# Altium PCB PCB_Automation System_final_2022-08-13.pcbdoc
Units mm, origin at the board's own origin, x right, y up, seen from the top; angles counter-clockwise.
Board outline 133.22 x 93.98 mm, 2 copper layers (Top Layer, Bottom Layer); 24 components, 25 nets, 102 pads, 9 vias.
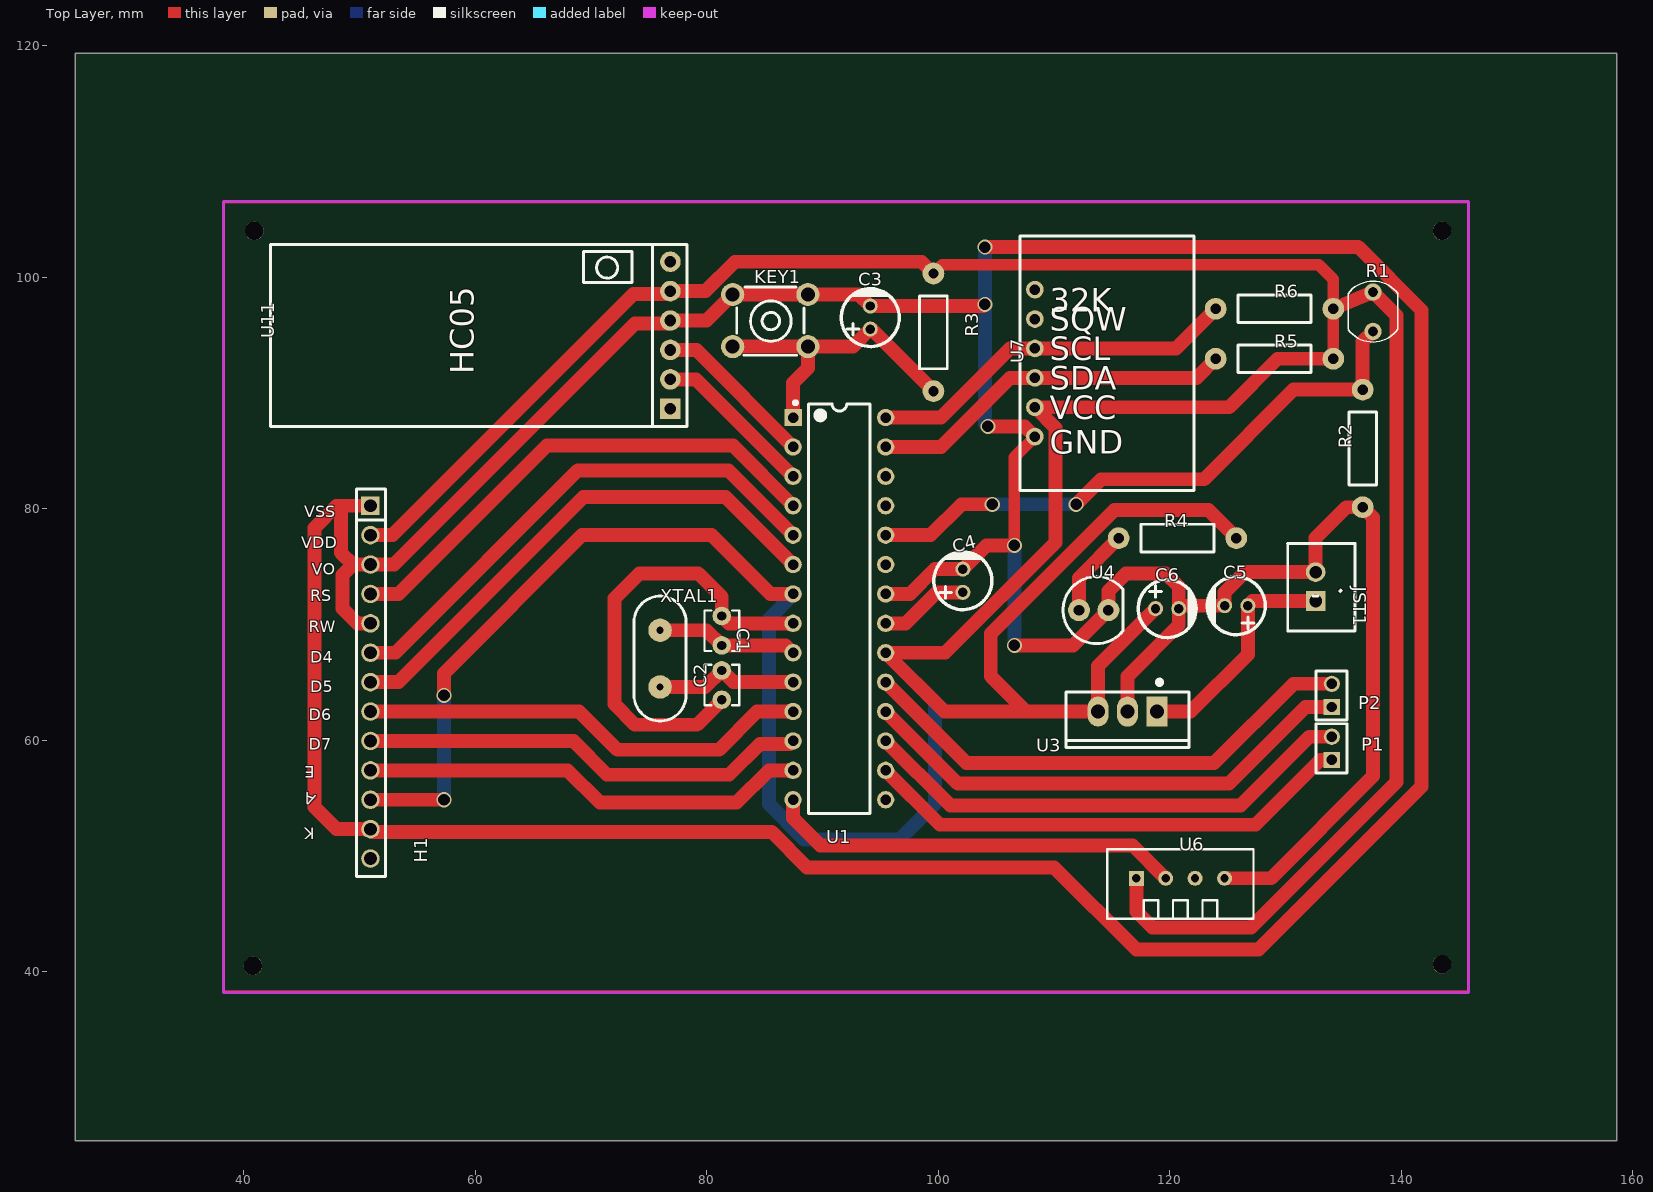
[diagram p0: Top Layer view]
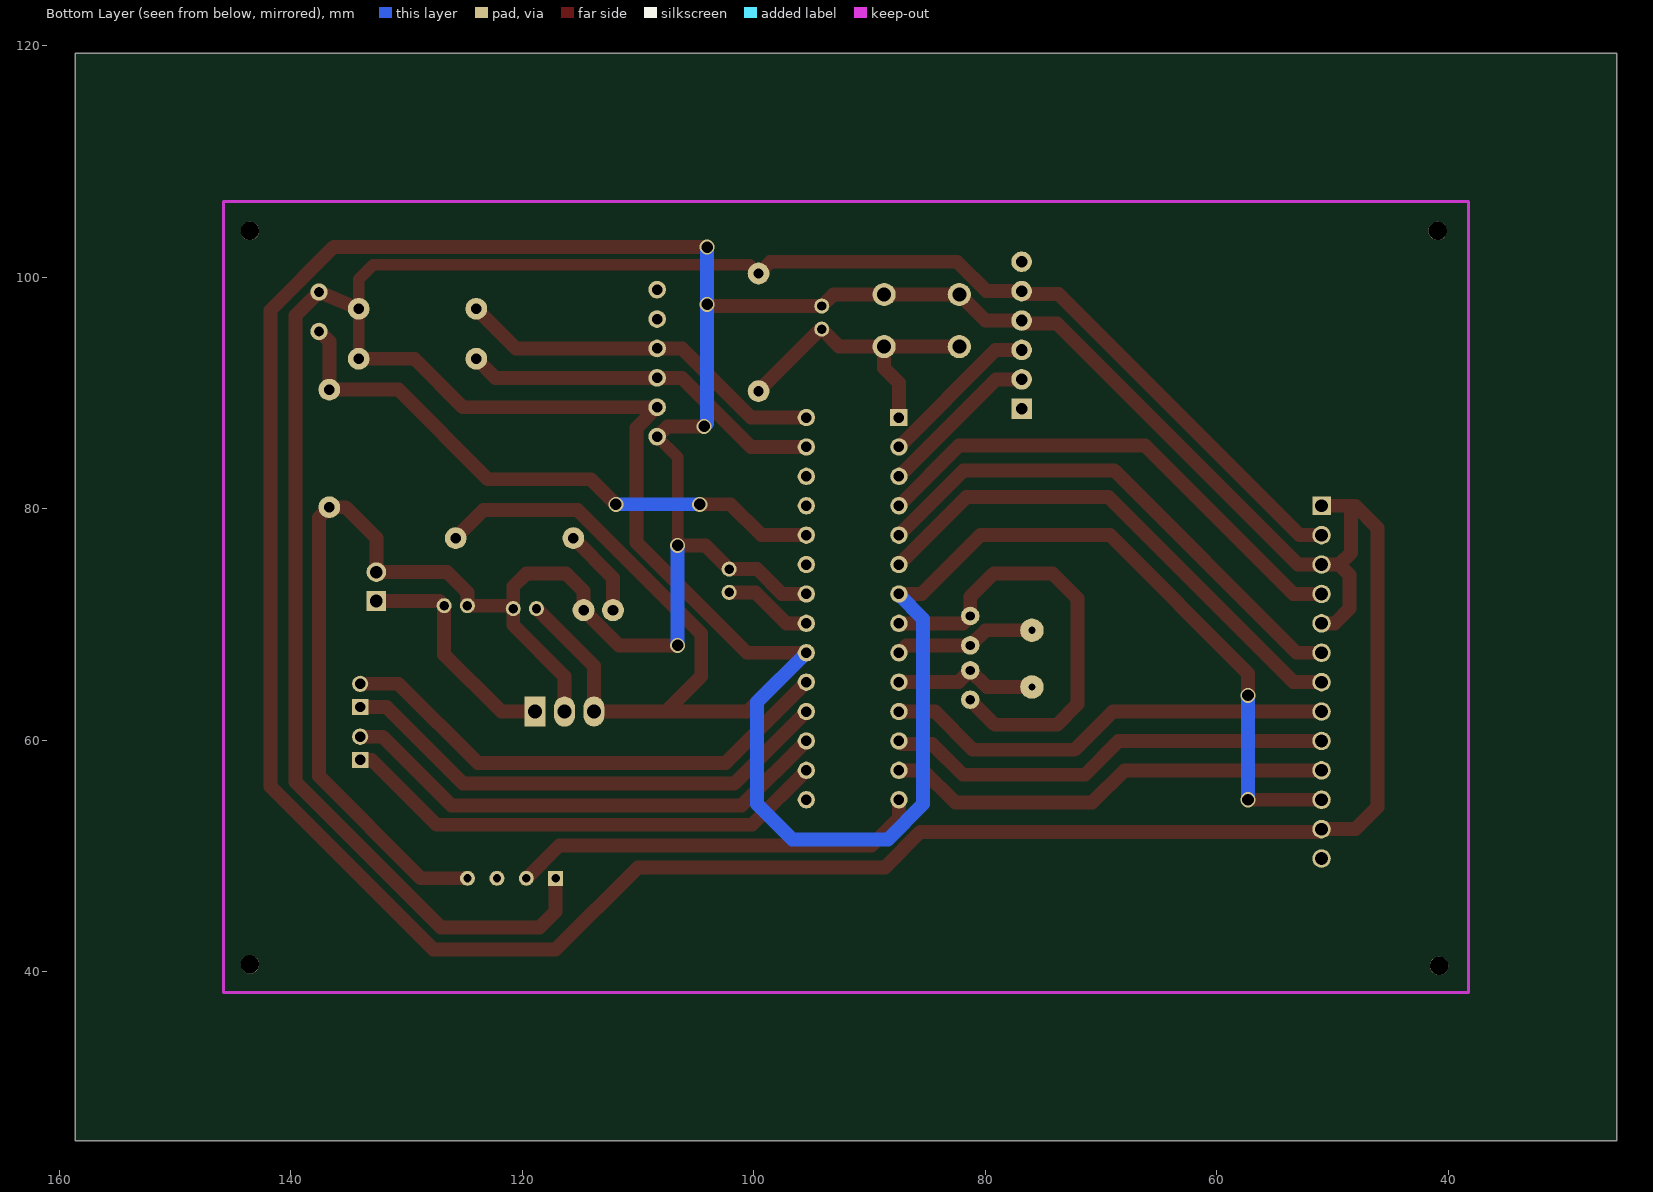
[diagram p1: Bottom Layer view, seen from below]

## Layer stack, top to bottom
Top Layer: signal copper (thickness not stored)
Dielectric: dielectric 0.32, FR-4, Dk 4.8
Bottom Layer: signal copper (thickness not stored)

## Board outline
158.623,25.4 25.4,25.4 25.4,119.38 158.623,119.38

## Components (designator, comment, footprint, x,y, rotation, side; value= is the part's Value field where it differs from the comment)
C1 "22pF" CAP-TH_L3.5-W3.0-P2.54-D0.8 81.28,69.469 r270 top
C2 "22pF" CAP-TH_L3.5-W3.0-P2.54-D0.8 81.28,64.77 r90 top
C3 "100nF" CAP-TH_BD5.0-P2.00-D0.8-FD 94.107,96.52 r90 top
C4 "100nF" CAP-TH_BD5.0-P2.00-D0.8-FD 102.108,73.787 r90 top
C5 "330nF" CAP-TH_BD5.0-P2.00-D0.8-FD 125.73,71.628 r180 top
C6 "100nF" CAP-TH_BD5.0-P2.00-D0.8-FD 119.761,71.374 r0 top
H1 "Header-Female-2.54_1x13" HDR-TH_13P-P2.54-V-F 50.927,65.024 r270 top
JST1 "POWER" CONN-TH_XHB-2A 132.588,73.279 r270 top
KEY1 "RST_BTN" KEY-TH_4P-L6.0-W6.0-P4.50 85.471,96.266 r180 top
P1 "Female header1*2P" HDR-TH_2P-P2.00-V 133.985,59.309 r90 top
P2 "Female header1*2P" HDR-TH_2P-P2.00-V 133.985,63.881 r90 top
R1 "LDR07" RESISTOR_LDR_5.1X4.3_RM3.4 137.541,97.028 r270 top
R2 "10k" AXIAL-0.4 136.652,85.217 r90 top
R3 "10K" AXIAL-0.4 99.568,95.25 r90 top
R4 "330Ω" AXIAL-0.4 120.65,77.47 r180 top
R5 "10K" AXIAL-0.4 129.032,92.964 r0 top
R6 "10K" AXIAL-0.4 129.032,97.282 r0 top
U1 "ATMEGA _328P-PU" DIP-28_L34.6-W7.3-P2.54-LS10.2-BL 91.44,71.374 r270 top
U3 "7805_Regulator" TO-220-3_L10.0-W4.5-P2.54-L 116.332,62.484 r180 top
U4 "LED" "5MM LED" 112.141,71.247 r0 top
U6 "DHT11" ? 120.904,47.879 r0 top
U7 "RTC_D3231" D3231 108.331,92.583 r90 top
U11 "HC05" HC05 76.835,88.646 r90 top
XTAL1 "16MHz" "16MHZ_OSC [PCB]" 75.946,67.056 r0 top

## Footprints (in the part's own frame and the unit in brackets; to place one, negate y for a bottom-side part, rotate by r counter-clockwise, add the part's x,y. Pads: shape width x height; smd on the part's side, far side on the other; paste and mask are expansions set on the pad)
"5MM LED" [mm]
  round 1.9 hole 0.914: 1(0,0) 2(2.54,0)
  silkscreen extent -1.37,-2.9 3.81,2.9
"16MHZ_OSC [PCB]" [mil]
  round 80 hole 25: 1(0,96.46) 2(0,-96.46)
  silkscreen extent -88,-212 88,212
AXIAL-0.4 [mil]
  round 74 hole 35.4: 1(-200,0) 2(200,0)
  silkscreen extent -124,-47 124,47
CAP-TH_BD5.0-P2.00-D0.8-FD [mm]
  round 1.3 hole 0.8: 1(-1,0) 2(1,0)
  silkscreen extent -2.5,-2.5 2.5,2.5
CAP-TH_L3.5-W3.0-P2.54-D0.8 [mm]
  round 1.6 hole 0.8: 1(-1.27,0) 2(1.27,0)
  silkscreen extent -1.75,-1.5 1.75,1.5
CONN-TH_XHB-2A [mm]
  rect 1.7x1.7 hole 1.1: 1(1.251,0)
  round 1.7 hole 1.1: 2(-1.251,0)
  silkscreen extent -3.75,-2.42 3.86,3.4
D3231 [mil]
  round 60 hole 36: 1(-249.92,-0.06) 2(-149.92,-0.06) 3(-49.92,-0.06) 4(50.08,-0.06) 5(150.08,-0.06) 6(250.08,-0.06)
  silkscreen extent -433,-541 433,50
DIP-28_L34.6-W7.3-P2.54-LS10.2-BL [mm]
  rect 1.5x1.5 hole 0.9: 1(-16.51,-4)
  round 1.5 hole 0.9: 2(-13.97,-4) 3(-11.43,-4) 4(-8.89,-4) 5(-6.35,-4) 6(-3.81,-4) 7(-1.27,-4) 8(1.27,-4) 9(3.81,-4) 10(6.35,-4) 11(8.89,-4) 12(11.43,-4) 13(13.97,-4) 14(16.51,-4) 15(16.51,4) 16(13.97,4) 17(11.43,4) 18(8.89,4) 19(6.35,4) 20(3.81,4) 21(1.27,4) 22(-1.27,4) 23(-3.81,4) 24(-6.35,4) 25(-8.89,4) 26(-11.43,4) 27(-13.97,4) 28(-16.51,4)
  silkscreen extent -17.94,-3.95 17.7,2.65
HC05 [mil]
  rect 70x70 hole 40: 1(0,0)
  round 70 hole 40: 2(100,0) 3(200,0) 4(300,0) 5(400,0) 6(500,0)
  silkscreen extent -60,-57 558,1360
HDR-TH_2P-P2.00-V [mm]
  rect 1.4x1.4 hole 0.889: 1(-1,0)
  round 1.4 hole 0.889: 2(1,0)
  silkscreen extent -2.14,-1.32 2.12,1.35
HDR-TH_13P-P2.54-V-F [mm]
  rect 1.6x1.6 hole 1.1: 1(-15.24,0)
  round 1.6 hole 1.1: 2(-12.7,0) 3(-10.16,0) 4(-7.62,0) 5(-5.08,0) 6(-2.54,0) 7(0,0) 8(2.54,0) 9(5.08,0) 10(7.62,0) 11(10.16,0) 12(12.7,0) 13(15.24,0)
  silkscreen extent -16.7,-1.2 16.8,1.3
KEY-TH_4P-L6.0-W6.0-P4.50 [mm]
  round 2 hole 1.2: 1(-3.25,-2.25) 2(3.25,-2.25) 3(3.25,2.25) 4(-3.25,2.25)
  silkscreen extent -2.9,-2.9 2.9,3
RESISTOR_LDR_5.1X4.3_RM3.4 [mm]
  round 1.5 hole 0.8 slot 0.805 at 0 deg: 1(-1.7,0) 2(1.701,0)
  silkscreen extent -2.65,-2.15 2.62,2.17
TO-220-3_L10.0-W4.5-P2.54-L [mm]
  rect 1.8x2.6 hole 1.2: 1(-2.54,0.005)
  oval 1.8x2.6 hole 1.2: 2(0,0.005) 3(2.54,-0.005)
  silkscreen extent -5.3,-2.73 5.3,3.09
? [mil]
  rect 51x51 hole 28: 1(-150,7.89)
  round 51 hole 28: 2(-50,7.89) 3(50,7.89) 4(150,7.89)
  silkscreen extent -248,-130 248,106

## Free pads (board coordinates)
  round 1.6 hole 1.6: 3(40.894,104.013) 4(40.767,40.513) 5(143.51,104.013) 6(143.51,40.64)

## Via types
v1: diameter 1.3, hole 1, Top Layer to Bottom Layer, tented both sides, 9 vias

## Nets (pads, with @x,y where several pads share a name; then routed paths per layer and width w, separated by ;. In a path a pad name is that pad's centre, name@x,y a point inside that pad or via, vN(x,y) a via of type N, cw(c..) or ccw(c..) an arc to the next point about the centre after c; other vN are vias at no path point)
+5V: C6.1 H1.2 H1.11 R1.1 R3.2 R4.1 R5.2 R6.2 U1.7 U1.20 U3.3 U6.1 U7.2 U11.5 | length 415.1
  Top Layer w1: R3.2 100.33,101.092 132.842,101.092 134.112,99.822 R6.2 R5.2
  Top Layer w1.2: H1.11 v1(57.277,54.864) ; H1.2 52.832,77.724 73.66,98.552 76.581,98.552 U11.5 79.883,98.806 82.423,101.346 98.552,101.346 R3.2 ; v1(57.277,63.881) 57.277,65.786 69.215,77.724 80.391,77.724 85.471,72.644 U1.7 ; U7.2@108.333,88.773 125.095,88.773 129.286,92.964 R5.2 ; U7.2 110.109,86.998 110.109,77.089 100.584,67.564 U1.20 100.515,62.489 U3.3 ; U6.1 117.094,45.212 118.491,43.815 127,43.815 139.573,56.388 139.573,96.695 R1.1 ; C6.1 113.792,66.405 U3.3 ; R4.1 123.317,79.883 115.189,79.883 104.521,69.215 104.521,65.532 107.564,62.489 U3.3 ; R6.2 R1.1@137.541,98.73
  Bottom Layer w1.2: v1(57.277,54.864) v1(57.277,63.881) ; U1.7 87.44,72.581 85.344,70.485 85.344,54.483 88.392,51.435 96.647,51.435 99.695,54.483 99.695,63.309 U1.20
D4: H1.7 U1.6 | length 45.6
  Top Layer w1.2: H1.7 53.34,65.024 69.342,81.026 81.597,81.026 U1.6
D5: H1.8 U1.11 | length 39.2
  Top Layer w1.2: H1.8 68.961,62.484 72.263,59.182 81.026,59.182 84.328,62.484 U1.11
D6: H1.9 U1.12 | length 38.9
  Top Layer w1.2: H1.9 68.453,59.944 71.374,57.023 81.915,57.023 84.582,59.69 87.185,59.69 U1.12
D7: H1.10 U1.13 | length 38.8
  Top Layer w1.2: H1.10 67.945,57.404 70.739,54.61 82.55,54.61 85.344,57.404 U1.13
DATA: U1.14 U6.2 | length 35.9
  Top Layer w1.2: U1.14 87.439,53.276 89.789,50.927 116.787,50.927 U6.2
ENABLE: H1.6 U1.5 | length 45.4
  Top Layer w1.2: H1.6 53.086,67.564 68.834,83.312 81.852,83.312 U1.5
GND: C1.1 C2.1 C3.2 C4.2 C5.2 C6.2 H1.1 H1.3 H1.5 H1.12 JST1.2 KEY1.1 KEY1.2 R2.1 U1.8 U1.22 U3.2 U4.2 U6.4 U7.1 U11.4 | length 481
  Top Layer w1: v1(106.553,76.835) 106.553,84.455 U7.1
  Top Layer w1.2: H1.5 49.784,70.104 48.514,71.374 48.514,74.295 49.403,75.184 ; C2.1 79.121,61.341 73.787,61.341 72.009,63.119 72.009,72.263 74.168,74.422 79.248,74.422 81.28,72.39 C1.1 81.915,70.104 U1.8 ; U1.22 97.536,72.644 99.68,74.788 C4.2 ; C4.2 104.156,76.835 v1(106.553,76.835) ; v1(104.013,97.663) 103.87,97.52 C3.2 93.111,98.516 KEY1.1 KEY1.2 79.971,96.266 U11.4 76.581,96.012 73.787,96.012 52.959,75.184 H1.3 49.403,75.184 ; v1(104.013,102.616) 136.271,102.616 141.732,97.155 141.732,56.007 127.635,41.91 117.094,41.91 109.982,49.022 88.646,49.022 85.598,52.07 51.181,52.07 H1.12 48.006,52.324 46.101,54.229 46.101,78.359 48.006,80.264 H1.1 48.387,80.264 48.387,76.2 49.403,75.184 ; v1(104.267,87.122) 107.446,87.122 U7.1 ; v1(106.553,68.199) 111.633,68.199 U4.2 114.681,72.898 116.205,74.422 119.634,74.422 120.761,73.295 C6.2 ; U3.2 116.332,65.532 120.761,69.961 C6.2 ; U6.4 128.725,48.08 137.541,56.896 137.541,79.248 R2.1 135.255,80.137 132.588,77.47 JST1.2 ; C5.2 124.729,72.786 126.472,74.531 JST1.2@132.588,74.531 ; C5.2 121.015,71.628 C6.2
  Bottom Layer w1.2: v1(104.013,102.616) v1(104.013,97.663) 104.013,87.376 v1(104.267,87.122) ; v1(106.553,68.199) v1(106.553,76.835)
RELAY1: P1.1 U1.16 | length 42.8
  Top Layer w1.2: U1.16 100.139,52.705 127.381,52.705 132.984,58.308 P1.1
RELAY2: P1.2 U1.17 | length 43.3
  Top Layer w1.2: U1.17 101.028,54.356 126.111,54.356 132.065,60.31 P1.2
RELAY3: P2.1 U1.18 | length 43.9
  Top Layer w1.2: U1.18 101.663,56.261 125.095,56.261 131.715,62.881 P2.1
RELAY4: P2.2 U1.19 | length 44.3
  Top Layer w1.2: U1.19 102.425,58.039 123.825,58.039 130.668,64.882 P2.2
RS: H1.4 U1.4 | length 44
  Top Layer w1.2: H1.4 53.34,72.644 66.167,85.471 82.233,85.471 U1.4
RX: U1.3 U11.2 | length 14.1
  Top Layer w1.2: U11.2 79.058,91.186 U1.3
S$68: 
SCL: R6.1 U1.28 U7.4 | length 32.4
  Top Layer w1.2: U1.28 100.203,87.884 106.175,93.856 U7.4 ; U7.4 120.525,93.855 R6.1
SDA: R5.1 U1.27 U7.3 | length 31.7
  Top Layer w1.2: U1.27 100.203,85.344 106.175,91.316 U7.3 ; U7.3 122.303,91.315 R5.1
TX: U1.2 U11.3 | length 14.1
  Top Layer w1.2: U11.3 79.121,93.726 79.121,93.663 U1.2
U1_1: C3.1 KEY1.3 KEY1.4 R3.1 U1.1 | length 26.8
  Top Layer w1.2: KEY1.3 KEY1.4 92.603,94.016 C3.1 94.218,95.52 R3.1 ; U1.1 87.439,90.868 88.72,92.149 KEY1.4@88.72,94.016
U1_9: C1.2 U1.9 XTAL1.1 | length 12.3
  Top Layer w1.2: XTAL1.1 79.973,69.506 C1.2 86.805,68.199 U1.9
U1_10: C2.2 U1.10 XTAL1.2 | length 12.5
  Top Layer w1.2: XTAL1.2 79.846,64.606 C2.2 82.296,65.024 U1.10
U1_21: C4.1 U1.21 | length 7.8
  Top Layer w1.2: U1.21 97.155,70.104 99.837,72.786 C4.1
U1_24: R1.2 R2.2 U1.24 | length 51.8
  Top Layer w1.2: U1.24 99.314,77.724 101.981,80.391 v1(104.648,80.391) ; v1(111.887,80.391) 114.046,82.55 122.936,82.55 130.683,90.297 R2.2 136.652,94.439 R1.2@137.541,95.328
  Bottom Layer w1.2: v1(104.648,80.391) v1(111.887,80.391)
U4_1: R4.2 U4.1 | length 7.6
  Top Layer w1.2: U4.1 112.141,74.041 R4.2
VCC: C5.1 JST1.1 U3.1 | length 20.1
  Top Layer w1.2: U3.1 121.788,62.479 126.73,67.421 C5.1 ; C5.1 127.13,72.027 JST1.1@132.588,72.027
pads on no net: H1.13 U1.15 U1.23 U1.25 U1.26 U6.3 U7.5 U7.6 U11.1 U11.6

## Polygon pours and split planes (outlines as drawn)
GND on Top Layer (solid): 38.354,106.426 145.669,106.426 145.669,38.354 38.354,38.354

## Silkscreen, mask and mechanical layers (free items; w line width, h text height)
Top Overlay:
  text "VSS" at 45.212,79.256 h1
  text "VDD" at 44.958,76.589 h1
  text "VO" at 45.847,74.303 h1
  text "RS" at 45.72,72.017 h1
  text "RW" at 45.593,69.35 h1
  text "D4" at 45.72,66.683 h1
  text "D5" at 45.72,64.143 h1
  text "D6" at 45.593,61.73 h1
  text "D7" at 45.593,59.19 h1
  text "E" at 46.101,57.777 h1 r180
  text "A" at 46.28,55.204 h1 r159
  text "K" at 46.101,52.443 h1 r180

## Text inside footprints (layer, text, board x,y; h text height)
U7: Top Overlay "GND" at 109.601,84.778 h2.03; Top Overlay "VCC" at 109.601,87.757 h2.03; Top Overlay "SDA" at 109.601,90.297 h2.03; Top Overlay "SCL" at 109.601,92.837 h2.03; Top Overlay "SQW" at 109.601,95.377 h2.03; Top Overlay "32K" at 109.601,97.028 h2.03